# EAGLE board apo_board (EAGLE 6.3)
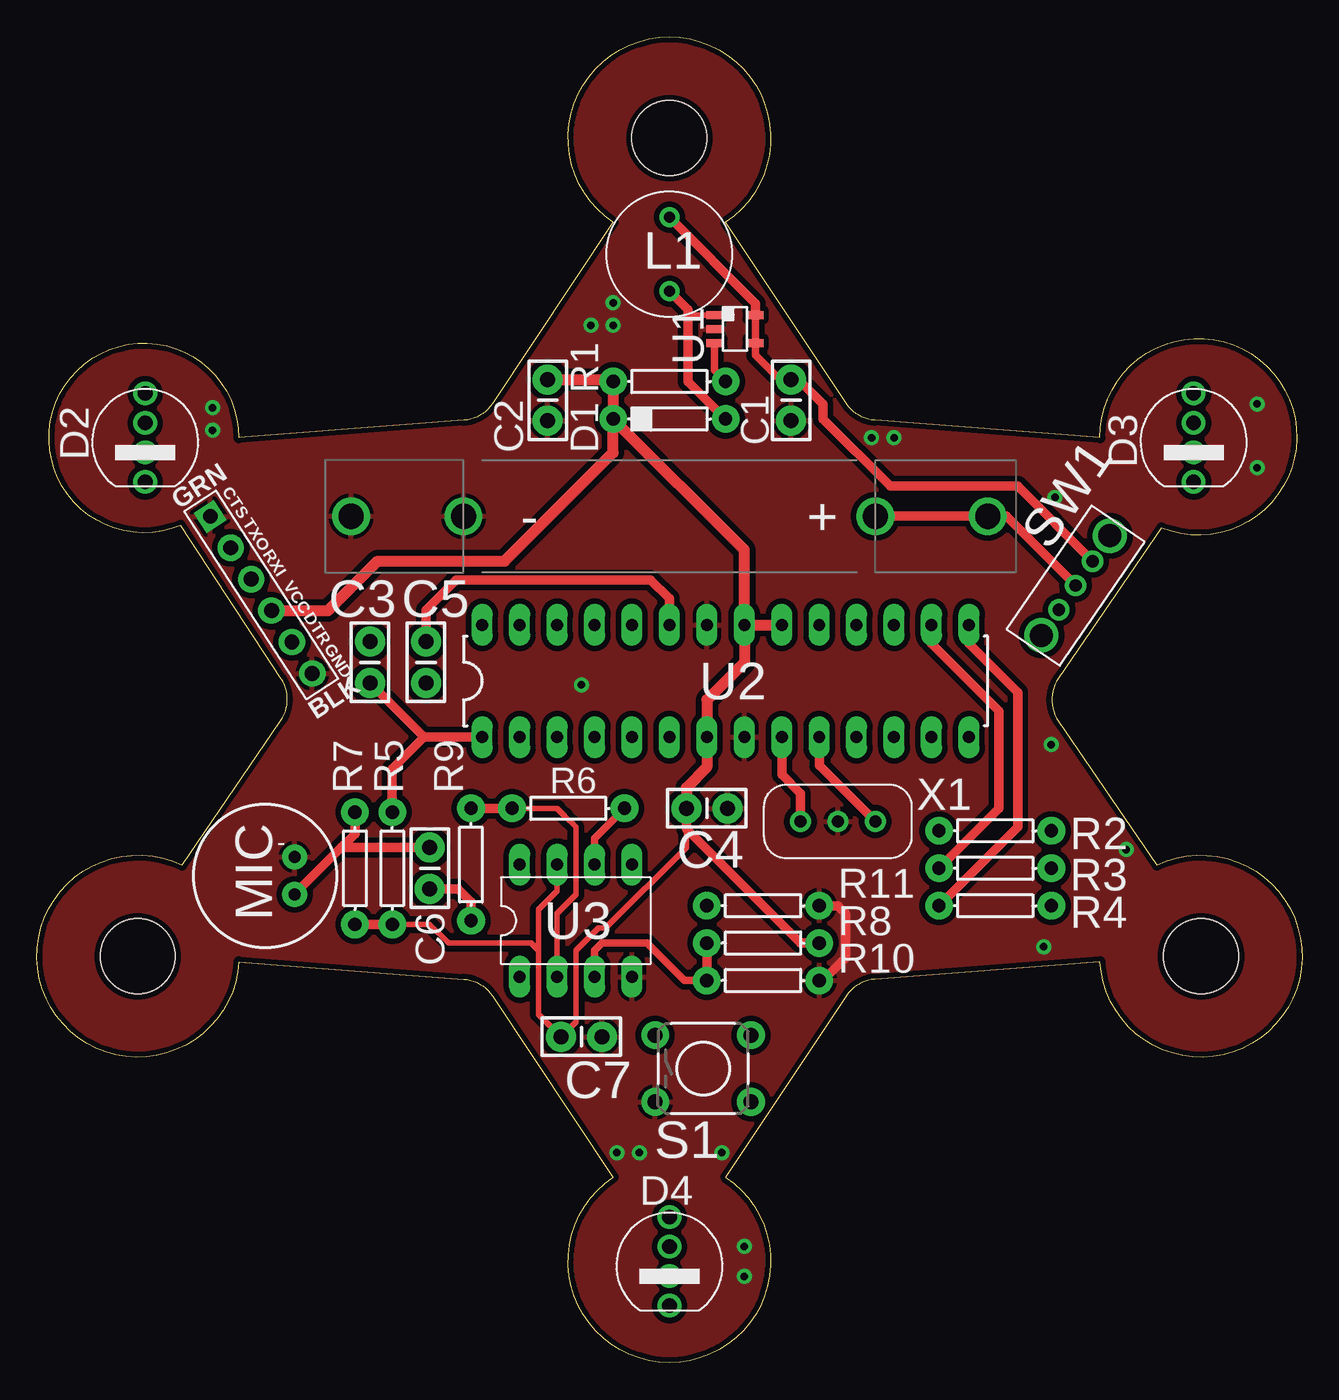
[diagram p0: board, top side]
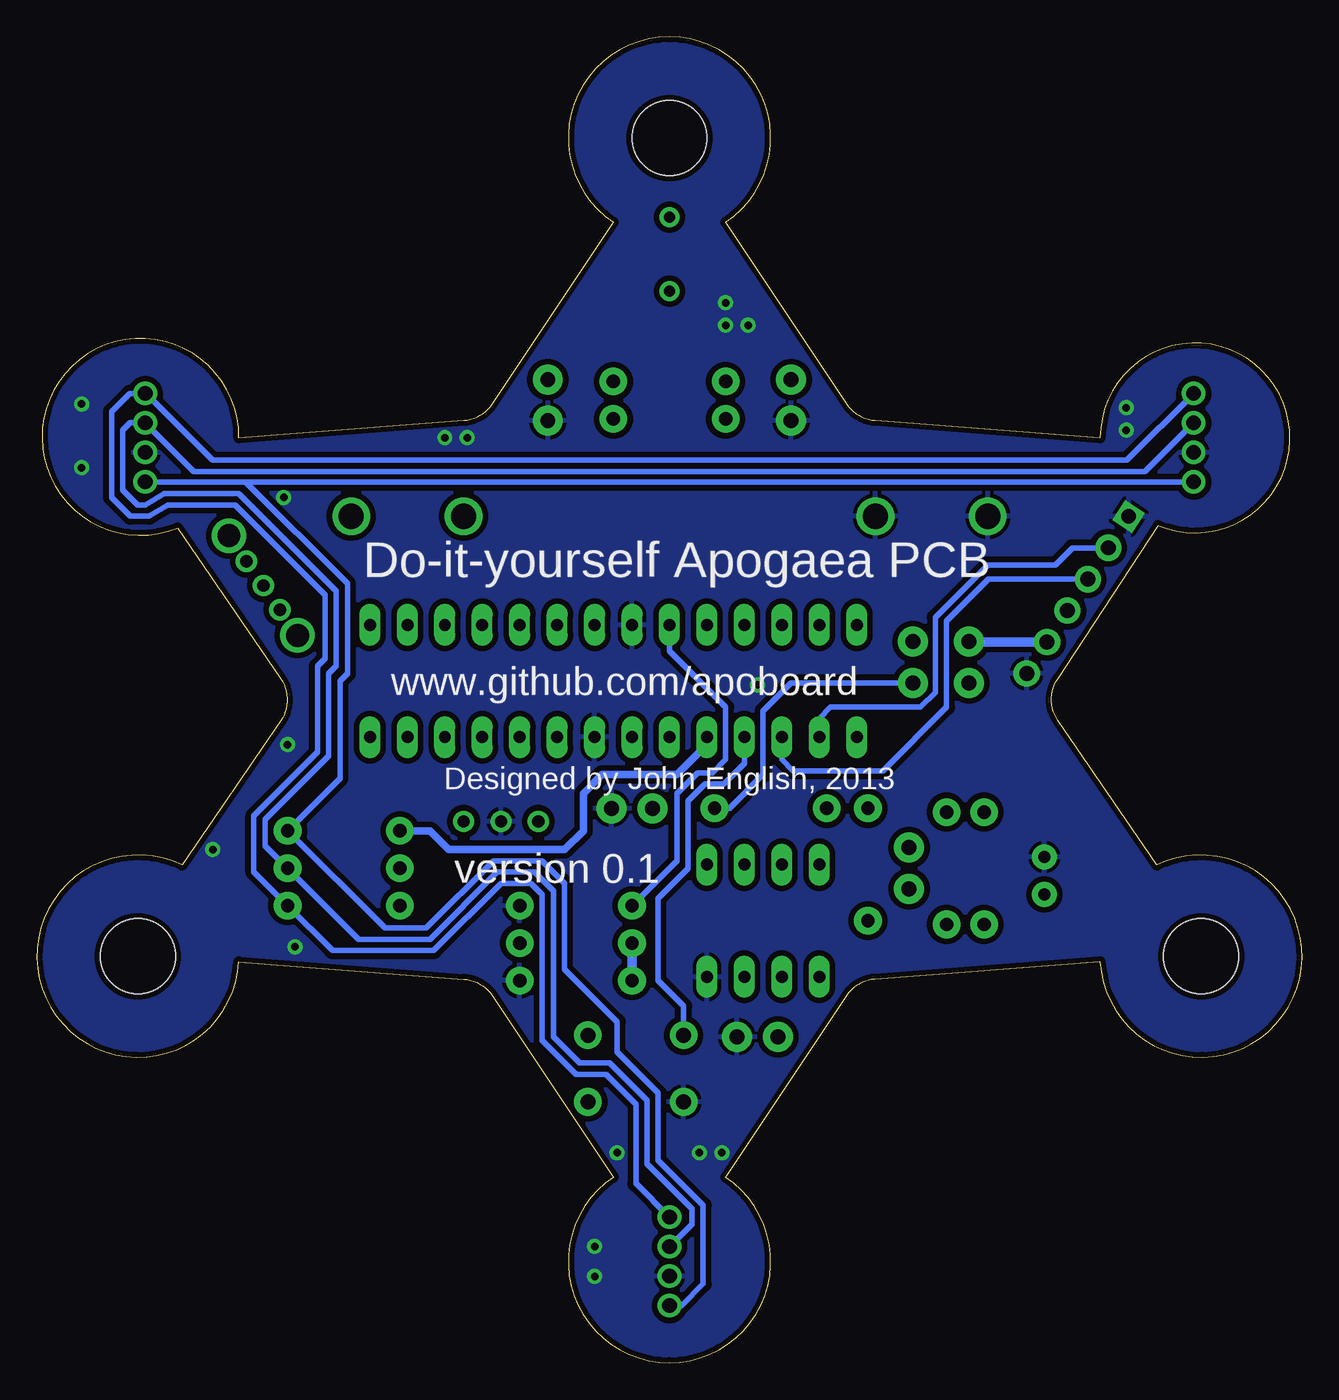
[diagram p1: board, bottom side, seen from below]

Size 85.83 x 89.94 mm. Coordinates in mm from the lower left corner, seen from the top.
Outline: 9.85,33.75 16.55,43.56 arc68 16.58,46.39 9.76,56.79 arc-293 13.7,62.75 28.98,63.92 arc52 30.9,65.05 39.1,77.35 arc-293 46.72,77.35 54.93,65.05 arc52 56.85,63.92 72.12,62.75 arc-293 76.29,56.62 69.29,46.4 arc69 69.29,43.53 75.98,33.75 arc-293 72.12,27.19 56.85,26.01 arc52 54.93,24.89 46.72,12.58 arc-293 39.1,12.58 30.9,24.89 arc52 28.98,26.01 13.7,27.19 arc-293 9.85,33.75
Copper layers (1*16): Top 0.035mm / dielectric 1.5mm / Bottom 0.035mm
Design rules "SparkFun-2-layer *": minimum track width 7mil, minimum drill 15mil, track to track 8mil, track to pad 8mil, pad to pad 8mil, via to via 8mil, smd to smd 8mil, copper to edge 8mil, drill to drill 8mil, minimum pad ring 12mil, minimum via ring 10mil, stop-mask expansion 4mil, vias tented up to drill 20mil, thermal gap 10mil
Holes 5.08 mm at 6.84,27.57 78.98,27.57 42.91,83.07

## Footprints (pad centres in the part's own frame; a part is rotated, then mirrored left to right if it is on the bottom)
BATTERY-AAA = drill 1.702: GND@1 21.59,0; GND@2 13.97,0; PWR@1 -21.59,0; PWR@2 -13.97,0
CAP-PTH-SMALL-KIT = drill 1.016 pad 2.032: 1 -1.397,0; 2 1.397,0
DIODE-1N4148 = drill 0.9 pad 1.88: A -3.81,0; C 3.81,0
LED-TRICOLOR-THROUGHHOLE = drill 1: BLU 3,0; GND -1,0; GRN 1,0; RED -3,0
FTDI_DEVICE_SIDE = drill 1 square: P$1 -6.35,0 | drill 1.016 pad 1.778: P$2 -3.81,0; P$3 -1.27,0; P$4 1.27,0; P$5 3.81,0; P$6 6.35,0
INDUCTOR_AIUR-02H = drill 0.737: P$1 0,2.502; P$2 0,-2.502
AXIAL-0.3 = drill 0.9 pad 1.88: P$1 -3.81,0; P$2 3.81,0
TACTILE-PTH = drill 1.016 pad 1.88: 1 -3.251,2.261; 2 3.251,2.261; 3 -3.251,-2.261; 4 3.251,-2.261
SWITCH_SPDT_OS102011MA1QN1C = drill 0.838: P$1 2.007,0; P$2 0,0; P$3 -2.007,0 | drill 1.549: P$4 -4.102,0; P$5 4.102,0
SOT23-5 = smd 0.55 x 1.05: 1 -0.95,-1.4; 2 0,-1.4; 3 0.95,-1.4; 4 0.95,1.4; 5 -0.95,1.4
DIL28-3 = drill 0.813 long: 1 -16.51,-3.81; 2 -13.97,-3.81; 3 -11.43,-3.81; 4 -8.89,-3.81; 5 -6.35,-3.81; 6 -3.81,-3.81; 7 -1.27,-3.81; 8 1.27,-3.81; 9 3.81,-3.81; 10 6.35,-3.81; 11 8.89,-3.81; 12 11.43,-3.81; 13 13.97,-3.81; 14 16.51,-3.81; 15 16.51,3.81; 16 13.97,3.81; 17 11.43,3.81; 18 8.89,3.81; 19 6.35,3.81; 20 3.81,3.81; 21 1.27,3.81; 22 -1.27,3.81; 23 -3.81,3.81; 24 -6.35,3.81; 25 -8.89,3.81; 26 -11.43,3.81; 27 -13.97,3.81; 28 -16.51,3.81
DIL08 = drill 0.813 long: 1 -3.81,-3.81; 2 -1.27,-3.81; 3 1.27,-3.81; 4 3.81,-3.81; 5 3.81,3.81; 6 1.27,3.81; 7 -1.27,3.81; 8 -3.81,3.81
MIC-9.7MM = drill 0.8 pad 1.676: 1 -2,1.27; 2 -2,-1.27
CERAMIC_RESONATOR_ZTT = drill 0.838: P$1 -2.54,0; P$2 0,0; P$3 2.54,0

## Placement (x,y rotation side)
BATT  BATTERY-2AAA  [BATTERY-AAA]  42.91,57.41 180 top
C1  22uF  [CAP-PTH-SMALL-KIT]  51.17,65.29 270 top
C2  22uF  [CAP-PTH-SMALL-KIT]  34.66,65.29 270 top
C3  0.1uF  [CAP-PTH-SMALL-KIT]  22.59,47.51 270 top
C4  4.7uF  [CAP-PTH-SMALL-KIT]  45.45,37.6 0 top
C5  4.7uF  [CAP-PTH-SMALL-KIT]  26.4,47.51 90 top
C6  4.7uF  [CAP-PTH-SMALL-KIT]  26.66,33.54 270 top
C7  4.7uF  [CAP-PTH-SMALL-KIT]  36.94,22.11 0 top
D1  [DIODE-1N4148]  42.91,64.02 180 top
D2  LED-TRICOLOR-THROUGHHOLE  [LED-TRICOLOR-THROUGHHOLE]  7.35,62.75 90 top
D3  LED-TRICOLOR-THROUGHHOLE  [LED-TRICOLOR-THROUGHHOLE]  78.47,62.75 90 top
D4  LED-TRICOLOR-THROUGHHOLE  [LED-TRICOLOR-THROUGHHOLE]  42.91,6.87 90 top
JP  FTDI_DEVICE  [FTDI_DEVICE_SIDE]  15.23,52.08 303 top
L1  22uH  [INDUCTOR_AIUR-02H]  42.91,75.19 0 top
R1  0  [AXIAL-0.3]  42.91,66.56 180 top
R2  250  [AXIAL-0.3]  65.01,36.08 0 top
R3  250  [AXIAL-0.3]  65.01,33.54 0 top
R4  1K  [AXIAL-0.3]  65.01,31 0 top
R5  20K  [AXIAL-0.3]  24.12,33.54 270 top
R6  1M  [AXIAL-0.3]  36.05,37.6 180 top
R7  20K  [AXIAL-0.3]  21.58,33.54 270 top
R8  20K  [AXIAL-0.3]  49.26,28.46 0 top
R9  20K  [AXIAL-0.3]  29.45,33.79 270 top
R10  20K  [AXIAL-0.3]  49.26,25.92 180 top
R11  20K  [AXIAL-0.3]  49.26,31 180 top
S1  SWITCH-MOMENTARY-2PTH  [TACTILE-PTH]  45.2,19.95 0 top
SW1  SWITCH_SPDT  [SWITCH_SPDT_OS102011MA1QN1C]  70.47,52.72 235.5 top
U1  SP6641A  [SOT23-5]  47.36,70.11 270 top
U2  ATMEGA328P_PDIP  [DIL28-3]  46.72,46.24 0 top
U3  [DIL08]  36.56,29.98 0 top
U4  MIC9.7MM  [MIC-9.7MM]  15.48,33.03 180 top
X1  16Mhz  [CERAMIC_RESONATOR_ZTT]  54.34,36.71 0 top

## Library data of the parts
BATT = SparkFun-Electromechanical
C1-C7 R1-R11 = SparkFun-Passives
D1 = SparkFun-DiscreteSemi
D2-D4 S1 U4 = SparkFun
JP = SparkFun-Connectors
L1 SW1 U1 X1 = 1_Dan Master
U2 = SparkFun-DigitalIC
U3 = linear

## Nets
+5V: C2.1 C4.1 C7.1 D1.C JP.P$4 R1.P$2 R5.P$2 R7.P$2 R8.P$2 U2.7 U2.20 U2.21 U3.7
BATT: BATT.PWR@1 BATT.PWR@2 SW1.P$2
BLU: R3.P$1 U2.16
DTR: C3.1 JP.P$5
GND: BATT.GND@1 BATT.GND@2 C1.2 C2.2 C4.2 C7.2 D2.GND D3.GND D4.GND JP.P$1 JP.P$6 R10.P$1 R11.P$1 S1.3 U1.2 U2.8 U2.22 U3.4 U4.2 X1.P$2
GRN: R4.P$1 U2.15
MIC_OUT: C5.2 R11.P$2 U2.23
N$1: U2.9 X1.P$1
N$2: U2.10 X1.P$3
N$3: S1.1 U2.4
N$4: C6.2 R9.P$2
N$5: R8.P$1 R10.P$2 U3.3
N$6: R6.P$2 R9.P$1 U3.2
N$7: C6.1 R7.P$1 U4.1
N$8: D2.GRN D3.GRN D4.GRN R3.P$2
N$9: D2.BLU D3.BLU D4.BLU R4.P$2
N$10: C3.2 R5.P$1 U2.1
N$11: C5.1 R6.P$1 U3.6
N$12: U2.24
N$13: D2.RED D3.RED D4.RED R2.P$2
N$14: D1.A L1.P$2 U1.1
N$16: C1.1 L1.P$1 SW1.P$3 U1.4 U1.5
N$17: R1.P$1 U1.3
RED: R2.P$1 U2.5
RX: JP.P$2 U2.2
TX: JP.P$3 U2.3

## Tracks (layer width: path | path; a pad name or v marks a point on that pad's centre or on a via)
+5V
  Top 0.381: R5.P$2 26.66,29.73 27.93,28.46 33.51,28.46 34.02,27.95 | 34.02,27.95 34.02,23.63 C7.1 36.56,23.12 36.56,27.95 38.09,29.47 38.59,29.47 44.06,34.94 44.06,36.21 | 34.02,27.95 34.02,30.74 35.29,32.01 U3.7
  Top 0.635: 38.98,66.69 R1.P$2 | R8.P$2 51.8,28.46 44.06,36.21 C4.1 | R7.P$2 R5.P$2
  Top 0.762: R1.P$2 D1.C | C2.1 38.98,66.69 | U2.21 47.99,55.13 D1.C | U2.21 U2.20 | U2.21 47.99,47.51 45.45,44.97 U2.7 45.45,40.4 44.06,39 C4.1 | JP.P$4 19.75,51.02 23.1,54.37 31.74,54.37 39.1,61.73 D1.C
BATT
  Top 0.635: BATT.PWR@2 BATT.PWR@1 65.77,57.41 SW1.P$2
BLU
  Top 0.635: U2.16 60.69,48.78 65.26,44.21 65.26,37.6 R3.P$1
DTR
  Bottom 0.635: JP.P$5 22.57,48.89 C3.1
GND  (via drill 0.51)
  Top 0.635: R10.P$1 53.33,25.92 54.85,27.44 54.85,30.49 54.34,31 R11.P$1
  other vias: 56.63,62.75 58.15,62.75 69.07,58.68 39.1,71.89 40.88,14.23 46.47,14.23 47.99,5.85 39.36,14.23 68.31,28.2 73.9,34.81 68.82,41.92 82.79,60.72 82.79,65.03 39.1,70.37 37.58,70.37 47.99,7.88 11.92,64.78 11.92,63.26 36.94,45.98
  pour Top (isolate 0.381, rank 6): 93.71,95.77 -7.89,95.77 -7.89,-5.83 93.71,-5.83
  pour Bottom (isolate 0.381, rank 6): 93.71,95.77 -7.89,95.77 -7.89,-5.83 93.71,-5.83
GRN
  Top 0.635: U2.15 63.23,48.78 66.53,45.48 66.53,36.33 R4.P$1
MIC_OUT
  Top 0.635: U2.23 42.91,51.83 41.64,53.1 28.43,53.1 26.4,51.06 C5.2
  Bottom 0.381: R11.P$2 42.4,34.05 42.4,38.62 41.01,40.02 39.99,40.02 39.1,40.9 39.1,44.46 42.91,48.27 U2.23
N$1
  Top 0.635: U2.9 50.53,39.89 51.8,38.62 X1.P$1
N$2
  Top 0.635: X1.P$3 53.07,40.52 U2.10
N$3
  Bottom 0.381: U2.4 37.83,40.65 39.23,39.25 40.5,39.25 41.64,38.11 41.64,33.54 43.67,31.51 43.67,25.92 41.95,24.19 S1.1
N$4
  Top 0.635: C6.2 28.56,32.14 29.45,31.25 R9.P$2
N$5
  Top 0.508: U3.3 37.83,27.95 38.34,28.46 41.39,28.46 43.93,25.92 R10.P$2
  Top 0.635: R8.P$1 R10.P$2
  Bottom 0.635: R8.P$1 R10.P$2
N$6
  Top 0.381: R6.P$2 35.29,37.6 35.8,37.09 36.56,36.33 36.56,31.76 35.29,30.49 U3.2
  Top 0.406: 32.63,37.48 32.24,37.48 R6.P$2
  Top 0.635: R9.P$1 R6.P$2
N$7
  Top 0.635: R7.P$1 21.58,35.86 20.66,34.94 | U4.1 17.88,32.16 20.66,34.94 | C6.1 20.66,34.94
N$8
  Bottom 0.381: D2.GRN 7.37,63.75 10.65,60.46 75.19,60.46 D3.GRN 78.49,63.76 79.49,63.76 80,63.26 80,59.19 78.98,58.18 78.47,58.18 77.2,58.94 72.12,58.94 65.52,52.33 65.52,47.25 66.03,46.75 66.03,41.16 70.34,36.84 70.34,35.06 R3.P$2 63.99,28.71 59.17,28.71 54.6,33.28 52.06,33.28 50.79,32.01 50.79,22.11 49.01,20.33 46.98,20.33 44.44,17.79 44.44,13.47 41.39,10.42 41.39,9.39 D4.GRN
N$9
  Bottom 0.381: D2.BLU 11.88,61.22 73.9,61.22 78.42,65.75 D3.BLU 79.54,65.75 80.76,64.53 80.76,58.68 79.49,57.41 78.22,57.41 76.95,58.18 72.38,58.18 66.28,52.08 66.28,47.76 66.79,47.25 66.79,41.41 71.11,37.09 71.11,33.28 R4.P$2 65.77,27.95 58.91,27.95 54.34,32.52 52.31,32.52 51.55,31.76 51.55,21.85 49.26,19.57 47.23,19.57 45.2,17.54 45.2,12.15 D4.BLU
N$10
  Top 0.635: U2.1 26.28,42.43 | 26.28,42.43 C3.2 | R5.P$1 24.12,40.27 26.28,42.43
N$11
  Top 0.508: U3.6 37.83,35.57 R6.P$1
  Bottom 0.381: C5.1 34.66,46.11 36.56,44.21 36.56,39.89 38.85,37.6 R6.P$1
N$13
  Bottom 0.381: D2.RED D3.RED 71.66,59.75 64.76,52.84 64.76,46.75 65.26,46.24 65.26,39.63 R2.P$2 62.22,29.47 59.42,29.47 54.85,34.05 51.55,34.05 50.02,32.52 50.02,26.68 46.47,23.12 46.47,21.09 43.67,18.3 43.67,13.73 40.63,10.68 40.63,5.34 42.1,3.87 D4.RED
N$14
  Top 0.381: U1.1 44.5,71.06 44.18,71.38
  Top 0.635: D1.A 44.18,66.56 44.18,71.38 44.18,71.42 L1.P$2
N$16
  Top 0.508: U1.5 U1.4 48.76,68.33 50.41,66.69 C1.1
  Top 0.635: C1.1 51.68,66.69 53.33,65.03 53.33,64.02 57.9,59.45 66.53,59.45 SW1.P$3 | U1.5 48.76,71.85 L1.P$1
N$17
  Top 0.508: U1.3 45.96,67.32 R1.P$1
RED
  Bottom 0.508: U2.5 40.37,41.92 42.4,39.89 47.48,39.89 48.75,38.62 48.75,36.08 50.02,34.81 57.9,34.81 59.17,36.08 R2.P$1
RX
  Bottom 0.381: U2.2 32.75,43.7 31.99,44.46 25.89,44.46 24.88,45.48 24.88,50.56 21.32,54.11 16.75,54.11 15.59,55.28 JP.P$2
TX
  Bottom 0.381: U2.3 35.29,40.9 34.53,40.14 28.43,40.14 24.12,44.46 24.12,50.3 21.27,53.15 JP.P$3

## Text on the board
tPlace: MIC
bPlace: Do-it-yourself Apogaea PCB | www.github.com/apoboard | Designed by John English, 2013 | version 0.1